# Altium PCB STM32F103RCT6_V2.1.pcbdoc (part 3 of 3)
Units mm, origin at the board's own origin, x right, y up, seen from the top; angles counter-clockwise.
Board outline 90.04 x 74.73 mm, 2 copper layers (Top Layer, Bottom Layer); 58 components, 75 nets, 672 pads, 147 vias.
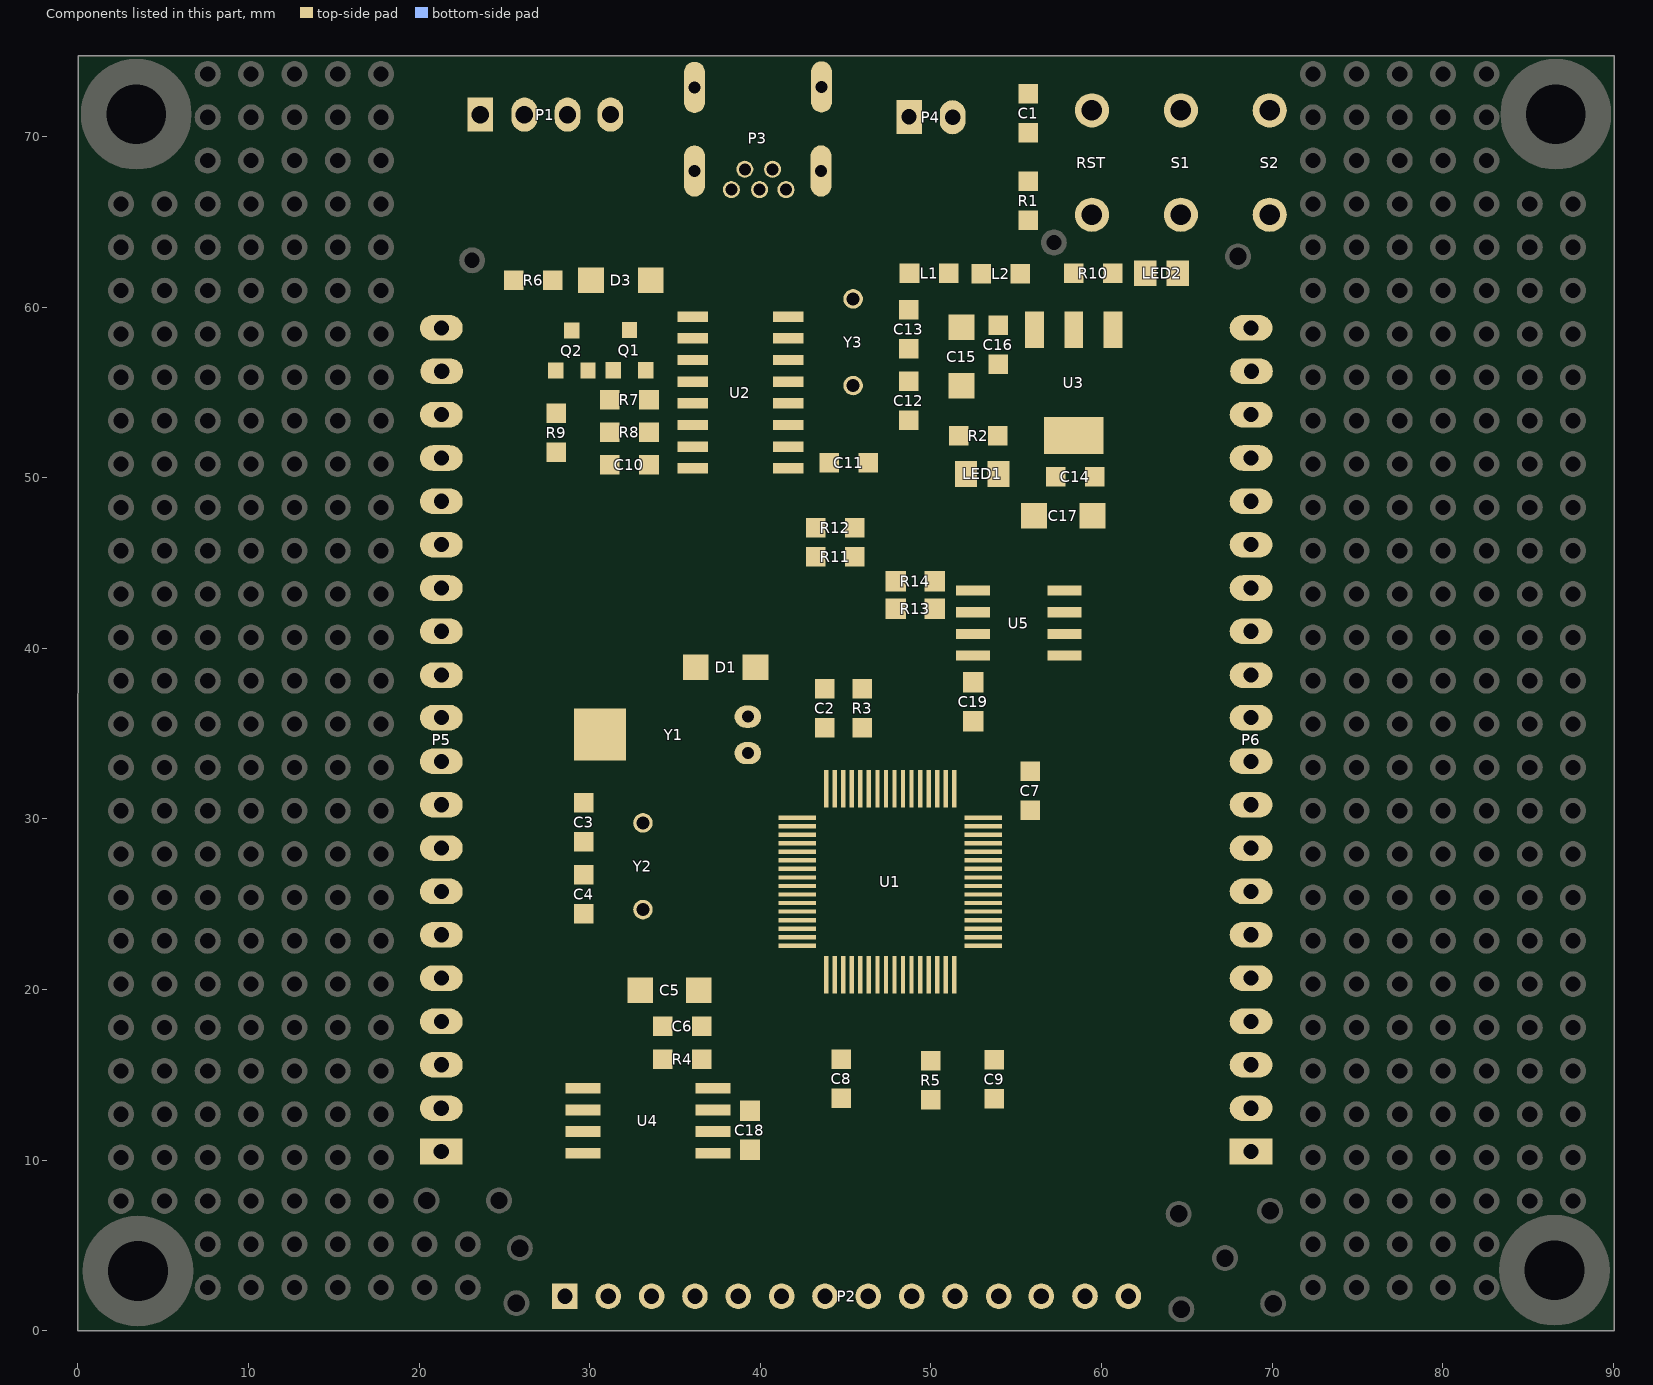
[diagram p3: the components of this part, seen from the top]

## Silkscreen, mask and mechanical layers (free items; w line width, h text height)
Top Overlay:
  lines w0.127: 69.367,43.739 69.52,43.586
  lines w0.203: 24.816,63.652 24.816,67.158 ; 27.381,63.678 27.381,67.158 ; 29.921,67.158 29.921,63.703 29.972,63.652 ; 49.301,64.211 49.301,67.081 ; 22.352,63.652 32.283,63.652 32.258,63.678 32.258,67.158 22.352,67.158 22.352,63.652 ; 46.076,64.186 46.101,64.16 53.772,64.16 53.797,64.186 53.797,67.132 46.076,67.132 46.076,64.186
  lines w0.254: 19.736,11.836 26.899,11.836 ; 19.736,14.326 26.899,14.326 ; 19.736,19.406 26.899,19.406 ; 19.736,21.946 26.899,21.946 ; 19.736,24.511 26.899,24.511 ; 19.736,27.026 26.899,27.026 ; 19.736,29.566 26.899,29.566 ; 19.736,34.646 26.899,34.646 ; 19.736,37.186 26.899,37.186 ; 19.736,39.726 26.899,39.726 ; 19.736,47.346 26.899,47.346 ; 19.736,49.911 26.899,49.911 ; 19.736,52.426 26.899,52.426 ; 19.736,54.966 26.899,54.966 ; 19.736,57.531 26.899,57.531 ; 19.761,32.106 26.924,32.106 ; 19.761,42.266 26.924,42.266 ; 19.787,8.265 26.949,8.265 26.949,60.376 22.784,60.376 ; 19.787,44.806 26.949,44.806 ; 19.812,16.84 26.975,16.84 ; 27.28,0.508 27.28,9.423 63.078,9.423 63.103,9.398 63.068,9.363 63.068,7.95 63.068,3.581 63.094,3.556 ; 29.845,0.508 29.845,7.925 29.845,9.347 29.896,9.398 ; 29.845,6.198 60.274,6.198 ; 32.283,9.423 32.334,9.373 32.334,7.925 32.334,0.508 ; 34.9,0.508 34.9,7.925 34.9,9.271 34.976,9.347 ; 37.465,0.508 37.465,7.925 37.465,9.398 37.49,9.423 ; 39.954,9.449 40.03,9.373 40.03,7.925 40.03,0.508 ; 42.52,0.508 42.52,7.925 42.52,9.423 ; 45.009,0.559 45.009,7.976 45.009,9.398 45.034,9.423 ; 47.625,0.508 47.625,7.925 47.625,9.373 47.676,9.423 ; 50.013,9.322 50.14,9.195 50.14,7.925 50.14,0.508 ; 52.654,9.449 52.68,9.423 52.68,7.925 52.68,0.508 ; 55.22,9.449 55.245,9.423 55.245,7.925 55.245,0.508 ; 57.81,0.508 57.81,7.925 57.81,9.322 57.836,9.347 ; 60.3,0.508 60.3,7.925 60.3,9.423 ; 63.078,52.47 70.241,52.47 ; 63.103,24.505 70.266,24.505 ; 63.129,27.045 70.292,27.045 ; 63.129,37.205 70.292,37.205 ; 63.154,11.78 70.317,11.78 ; 63.154,14.345 70.317,14.345 ; 63.154,16.885 70.317,16.885 ; 63.154,19.4 70.317,19.4 ; 63.154,21.965 70.317,21.965 ; 63.154,29.585 70.317,29.585 ; 63.154,32.125 70.317,32.125 ; 63.154,34.665 70.317,34.665 ; 63.154,39.745 70.317,39.745 ; 63.154,42.285 70.317,42.285 ; 63.154,44.8 70.317,44.8 ; 63.154,47.365 70.317,47.365 ; 63.154,49.905 70.317,49.905 ; 63.154,54.985 70.317,54.985 ; 63.154,57.474 70.317,57.474 ; 67.345,60.411 63.103,60.411 63.103,8.265 70.282,8.265
  text "3.3V" at 22.962,66.802 h1.02 r270
  text "GND" at 30.582,66.726 h1.02 r270
  text "CLK" at 28.118,66.65 h1.02 r270
  text "DIO" at 25.552,66.37 h1.02 r270
  text "GND" at 49.606,64.846 h1.52
  text "5V" at 46.431,64.821 h1.52
  text "GND" at 63.738,58.455 h1.02
  text "GND" at 23.419,58.293 h1.14
  text "GND" at 63.738,55.814 h1.02
  text "GND" at 23.419,55.677 h1.14
  text "PD2" at 23.292,53.137 h1.02
  text "PB15" at 63.678,53.086 h1.02
  text "PB14" at 63.652,50.851 h1.02
  text "PC13" at 23.241,50.622 h1.02
  text "PC12" at 23.241,48.057 h1.02
  text "PB13" at 63.652,47.981 h1.02
  text "TXD1" at 46.685,46.558 h0.89
  text "PC11" at 23.241,45.593 h1.02
  text "PB12" at 63.652,45.542 h1.02
  text "RXD1" at 46.736,44.882 h0.89
  text "PC10" at 23.241,43.053 h1.02
  text "STM32F103RCT6-V2.1" at 27.864,43.053 h1.14
  text "PB11" at 63.602,42.977 h1.02
  text "20210628" at 36.881,41.275 h1.14
  text "PC9" at 23.266,40.386 h1.02
  text "PB10" at 63.551,40.386 h1.02
  text "PC8" at 23.266,37.948 h1.02
  text "PB9" at 63.906,37.922 h1.02
  text "PA7" at 23.216,35.382 h1.02
  text "PB8" at 63.906,35.331 h1.02
  text "PB7" at 63.881,32.868 h1.02
  text "PA6" at 23.241,32.791 h1.02
  text "PB6" at 63.856,30.378 h1.02
  text "PA5" at 23.241,30.353 h1.02
  text "PB5" at 63.881,27.762 h1.02
  text "PA4" at 23.241,27.686 h1.02
  text "PA3" at 23.19,25.298 h1.02
  text "PB4" at 63.856,25.197 h1.02
  text "PB3" at 63.856,22.733 h1.02
  text "PA2" at 23.266,22.657 h1.02
  text "VDDA" at 37.694,21.615 h1.02
  text "PA1" at 23.266,20.142 h1.02
  text "PB2" at 63.83,20.117 h1.02
  text "PA0" at 23.292,17.628 h1.02
  text "PB1" at 63.83,17.526 h1.02
  text "VBAT" at 23.165,15.011 h1.02
  text "PB0" at 63.754,14.935 h1.02
  text "3.3V" at 63.738,12.634 h1.02
  text "3.3V" at 23.343,12.598 h1.02
  text "3.3V" at 63.738,10.043 h1.02
  text "3.3V" at 23.317,9.855 h1.02
  text "PA15" at 37.719,9.195 h0.89 r270
  text "PA12" at 35.179,9.169 h0.89 r270
  text "PC0" at 40.792,9.144 h1.02 r270
  text "PC7" at 58.471,9.144 h1.02 r270
  text "PC1" at 43.358,9.093 h1.02 r270
  text "PC3" at 48.336,9.093 h1.02 r270
  text "PC4" at 50.825,9.093 h1.02 r270
  text "PC5" at 53.492,9.093 h1.02 r270
  text "PC6" at 55.982,9.093 h1.02 r270
  text "PA8" at 30.607,9.068 h1.02 r270
  text "PA11" at 32.715,9.068 h0.89 r270
  text "PC2" at 45.745,9.068 h1.02 r270
  text "GND" at 61.087,7.137 h1.02 r270
  text "3.3V" at 28.118,6.934 h1.02 r270
  text "WR" at 35.763,5.905 h1.02 r270
  text "CS" at 30.556,5.745 h1.02 r270
  text "RS" at 33.045,5.639 h1.02 r270
  text "RD" at 38.252,5.639 h1.02 r270
  text "D0" at 40.615,5.639 h1.02 r270
  text "D1" at 43.231,5.639 h1.02 r270
  text "D2" at 45.847,5.639 h1.02 r270
  text "D3" at 48.463,5.639 h1.02 r270
  text "D4" at 51.079,5.639 h1.02 r270
  text "D5" at 53.492,5.639 h1.02 r270
  text "D6" at 55.931,5.639 h1.02 r270
  text "D7" at 58.649,5.639 h1.02 r270
Mechanical 1:
  lines w0.127: 0,34.717 90.038,34.717 ; 45,0 45,74.693 ; 88.768,34.717 88.773,34.722